# Altium PCB PCB.PcbDoc
Units mm, origin at the board's own origin, x right, y up, seen from the top; angles counter-clockwise.
Board outline 82.93 x 56.77 mm, 2 copper layers (Top Layer, Bottom Layer); 30 components, 26 nets, 99 pads, 0 vias.
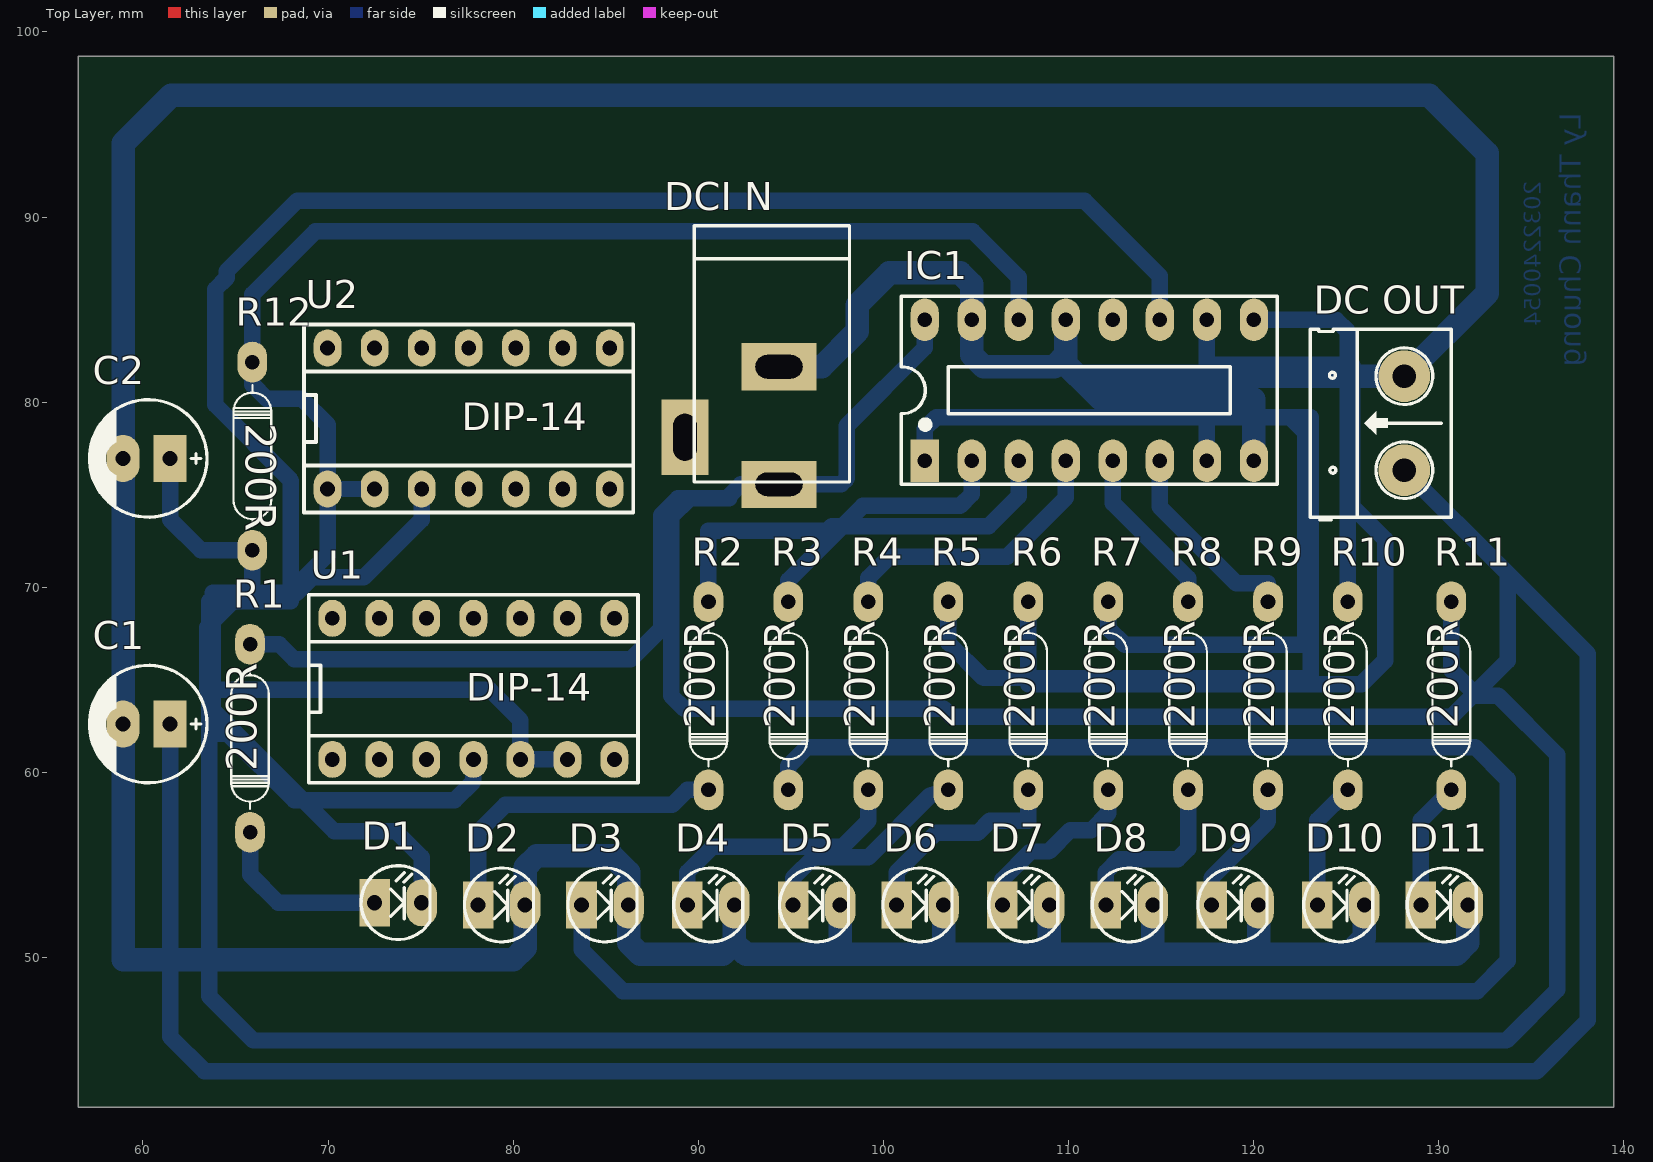
[diagram p0: Top Layer view]
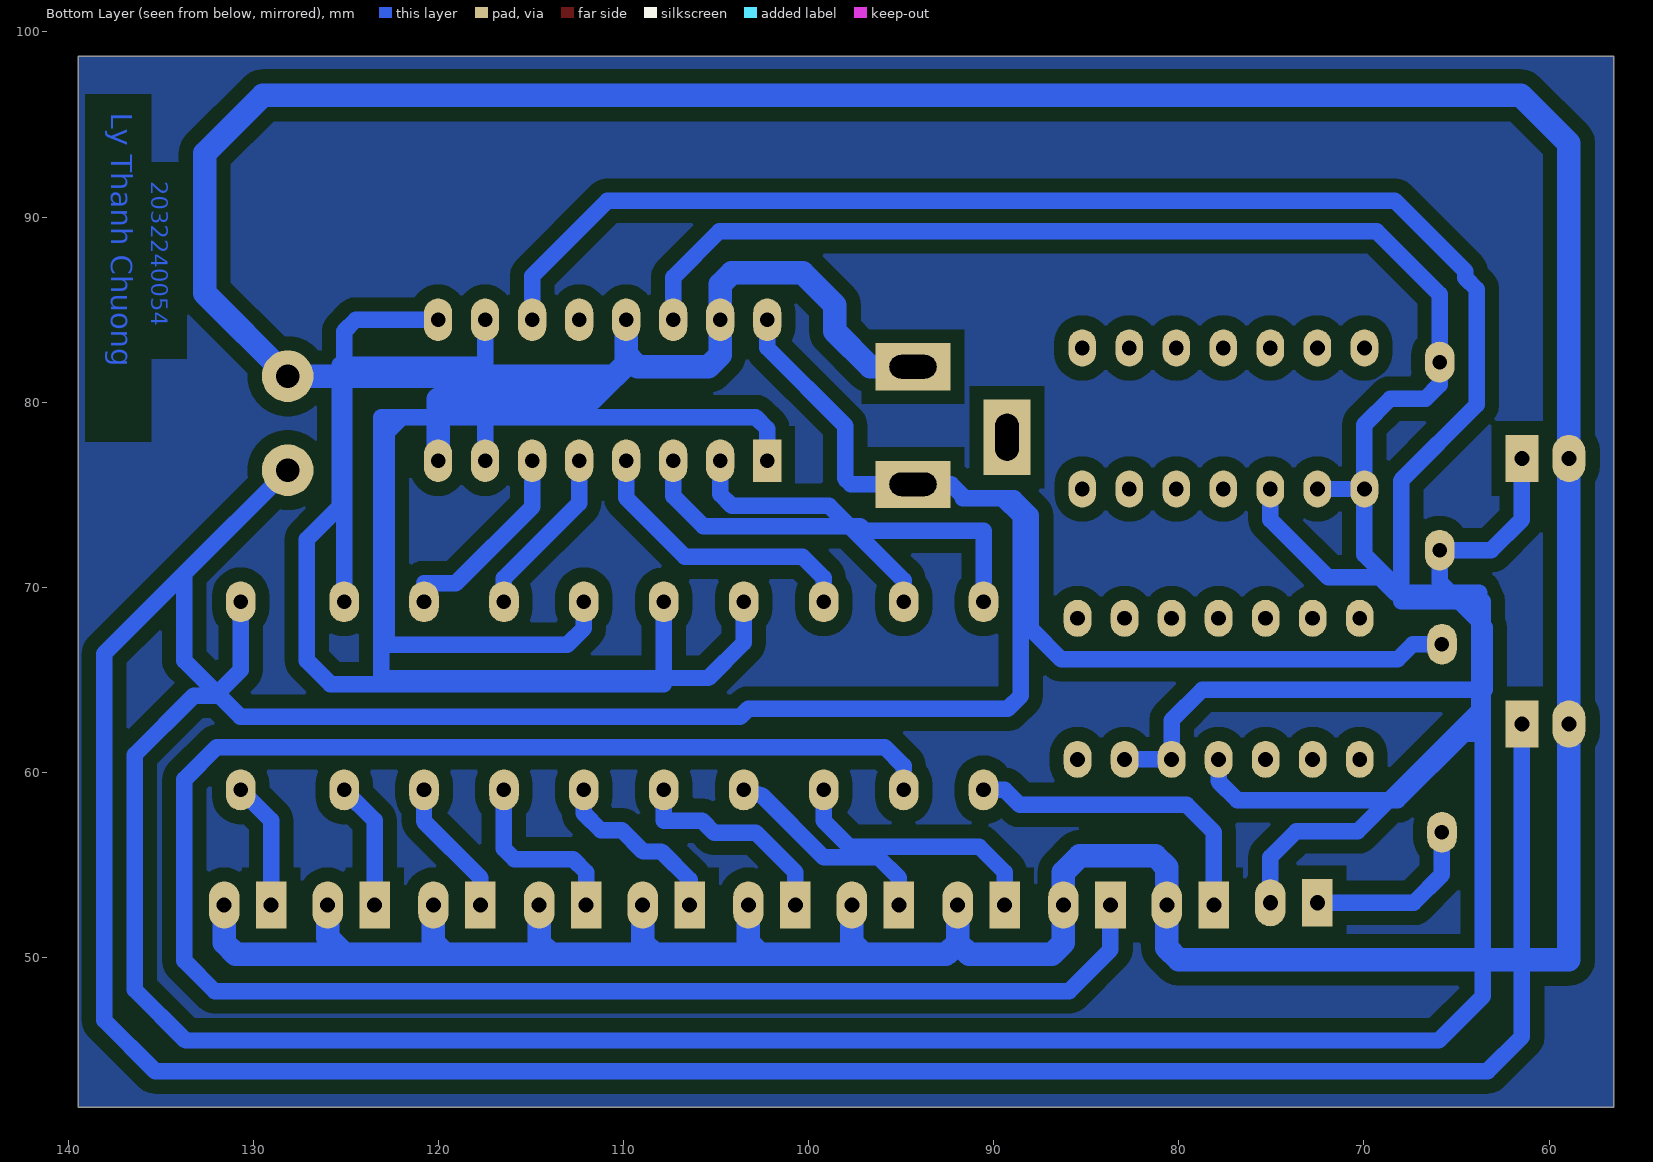
[diagram p1: Bottom Layer view, seen from below]
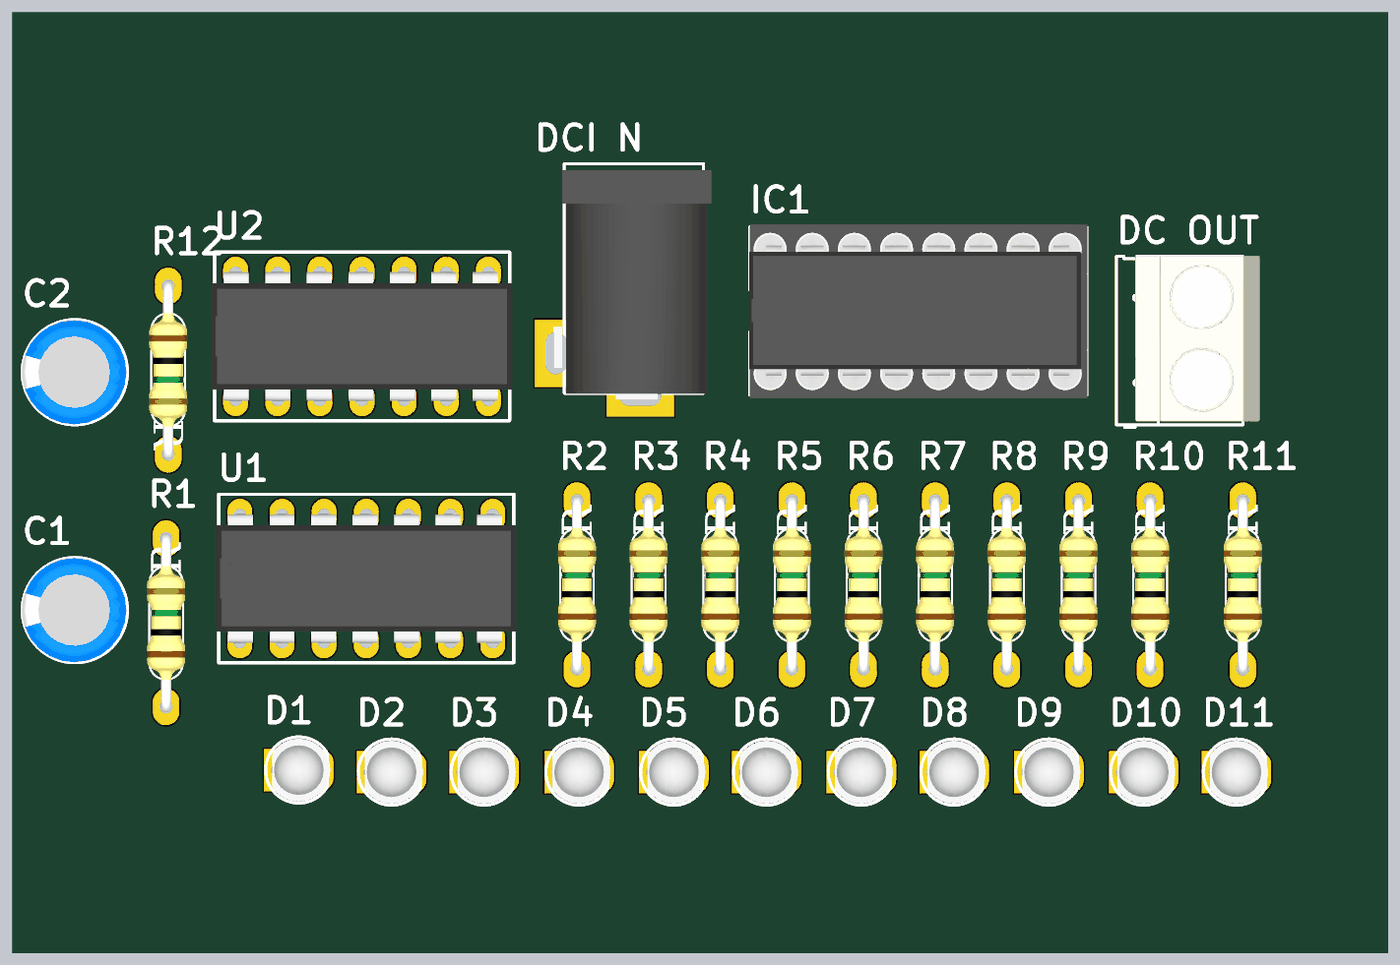
[diagram p2: 3D render of the assembled board from above, using the file's embedded part models]

## Layer stack, top to bottom
Top Solder: solder mask 0.0102, Solder Resist, Dk 3.5
Top Layer: signal copper 0.0356
Dielectric 1: dielectric 0.32, FR-4, Dk 4.8
Bottom Layer: signal copper 0.0356
Bottom Solder: solder mask 0.0102, Solder Resist, Dk 3.5

## Board outline
56.515,41.91 139.446,41.91 139.446,98.679 56.515,98.679

## Design rules (kind name [scope] priority, off if disabled: settings)
Clearance Clearance_1 [All] p1: gap=0.762 ignorepadtopadclearanceinfootprint=FALSE
Clearance [All] p2: gap=0.381 ignorepadtopadclearanceinfootprint=FALSE
PolygonConnect [All] p1: connectstyle=Relief reliefconductorwidth=0.254 reliefentries=4 polygonreliefangle="90 Angle" airgapwidth=0.254
RoutingLayers [All] p1: top layer_v5=FALSE bottom layer_v5=TRUE
RoutingVias [All] p1: holewidth=0.711 width=1.27 viastyle="Through Hole" minholewidth=0.711 minwidth=1.27 maxholewidth=0.711 maxwidth=1.27
SolderMaskExpansion [All] p1: expansion=0.102 istentingtop=FALSE
Width Width_1 [InNet('GND')] p1: maxlimit=1.27 minlimit=1.27 preferedwidth=1.27
Width [All] p2: maxlimit=1.016 minlimit=0.508 preferedwidth=0.889
29 further rules are at their usual default settings.

## Components (designator, comment, footprint, x,y, rotation, side; value= is the part's Value field where it differs from the comment)
C1 "47uF" CP1/2.5 61.468,62.611 r180 top value="47uF/16 - 50V"
C2 "1uF" CP1/2.5 61.468,76.962 r180 top value="47uF/16 - 50V"
D1 "LED" LED-3 72.517,52.959 r0 top value="LED 3 ly Single Colour"
D2 "LED" LED-3 78.105,52.832 r0 top value="LED 3 ly Single Colour"
D3 "LED" LED-3 83.693,52.832 r0 top value="LED 3 ly Single Colour"
D4 "LED" LED-3 89.408,52.832 r0 top value="LED 3 ly Single Colour"
D5 "LED" LED-3 95.123,52.832 r0 top value="LED 3 ly Single Colour"
D6 "LED" LED-3 100.711,52.832 r0 top value="LED 3 ly Single Colour"
D7 "LED" LED-3 106.426,52.832 r0 top value="LED 3 ly Single Colour"
D8 "LED" LED-3 112.014,52.832 r0 top value="LED 3 ly Single Colour"
D9 "LED" LED-3 117.729,52.832 r0 top value="LED 3 ly Single Colour"
D10 "LED" LED-3 123.444,52.832 r0 top value="LED 3 ly Single Colour"
D11 "LED" LED-3 129.032,52.832 r0 top value="LED 3 ly Single Colour"
"DC OUT" "Header 2" HED2 128.143,76.327 r90 top
"DCI N" "Jac DC" DC-IN 91.821,78.74 r270 top
IC1 "4017" DIP16/W0.3 102.235,76.835 r0 top value=CD4017
R1 "680" "DIEN TRO 1/4 W" 65.786,56.769 r90 top value=R
R2 "680" "DIEN TRO 1/4 W" 90.551,59.055 r90 top value=R
R3 "680" "DIEN TRO 1/4 W" 94.869,59.055 r90 top value=R
R4 "680" "DIEN TRO 1/4 W" 99.187,59.055 r90 top value=R
R5 "680" "DIEN TRO 1/4 W" 103.505,59.055 r90 top value=R
R6 "680" "DIEN TRO 1/4 W" 107.823,59.055 r90 top value=R
R7 "680" "DIEN TRO 1/4 W" 112.141,59.055 r90 top value=R
R8 "680" "DIEN TRO 1/4 W" 116.459,59.055 r90 top value=R
R9 "680" "DIEN TRO 1/4 W" 120.777,59.055 r90 top value=R
R10 "680" "DIEN TRO 1/4 W" 125.095,59.055 r90 top value=R
R11 "680" "DIEN TRO 1/4 W" 130.683,59.055 r90 top value=R
R12 "1M" "DIEN TRO 1/4 W" 65.913,82.169 r270 top value=R
U1 "4093" DIP14 77.851,64.516 r0 top
U2 "4093" DIP14 77.597,79.121 r0 top

## Footprints (in the part's own frame and the unit in brackets; to place one, negate y for a bottom-side part, rotate by r counter-clockwise, add the part's x,y. Pads: shape width x height; smd on the part's side, far side on the other; paste and mask are expansions set on the pad)
CP1/2.5 [mil] "Tu hoa 33 >100 uF,50V, 220uF/16V,25V"
  rect 70x100 hole 32: 1(0,0)
  oval 70x100 hole 32: 2(100,0)
  silkscreen extent -78,-125 172,125, body extent -76,-124 172,124, height 422
DC-IN [mil] "Jac DC input"
  rect 100x160 hole 50 slot 100 at 90 deg: 1(125,100) 2(-125,100)
  rect 160x100 hole 50 slot 100 at 0 deg: 3(25,-100)
  silkscreen extent -425,-80 120,250, body extent -410,-105 134,269, height 434
"DIEN TRO 1/4 W" [mm]
  oval 2.2x1.6 hole 0.787: 1(0,0) 2(10.16,0)
  silkscreen extent 1.26,-1.02 8.88,1.02, body extent -0.3,-1.16 10.46,1.16, height 2.93
DIP14 [mm] "W.300/L.900"
  oval 1.5x2 hole 0.8: 1(-7.62,-3.81) 2(-5.08,-3.81) 3(-2.54,-3.81) 4(0,-3.81) 5(2.54,-3.81) 6(5.08,-3.81) 7(7.62,-3.81) 8(7.62,3.81) 9(5.08,3.81) 10(2.54,3.81) 11(0,3.81) 12(-2.54,3.81) 13(-5.08,3.81) 14(-7.62,3.81)
  silkscreen extent -8.89,-5.08 8.89,5.08, body extent -9.05,-3.88 9.05,3.88, height 4.5
DIP16/W0.3 [mil] "16 PIN, W 300mil, Pin to pin 100mil"
  rect 60x90 hole 31: 1(0,0)
  oval 60x90 hole 31: 2(100,0) 3(200,0) 4(300,0) 5(400,0) 6(500,0) 7(600,0) 8(700,0) 9(700,300) 10(600,300) 11(500,300) 12(400,300) 13(300,300) 14(200,300) 15(100,300) 16(0,300)
  silkscreen extent -50,-50 750,350, body extent -52,-57 752,356, height 299
HED2 [mil] "Header 2, 2 pin, hight 300mil, Pin to Pin 200, Colour Green"
  round 110 hole 50: 1(0,0) 2(200,0)
  silkscreen extent -106,-100 300,200, body extent -92,-140 302,155, height 394
LED-3 [mil] "LED 2 PIN, 3ly Only colour"
  rect 65x100 hole 32: 1(0,0)
  oval 65x100 hole 32: 2(100,0)
  silkscreen extent -29,-78 118,79, body extent -13,-75 125,75, height 217

## Part data
C1 C2: library part CP2, "C 47uF/50V , 220uF/16V", Description 1="470uF/6,3V - 330uF/10V - 220uF/16V", Description 2="100uF/25V - 35V - 47uF/50V - 22uF/100V", Description 3="33uF => 47uF/63V - 1uF => 4,7uF/160V", Description 4="1uF => 2,2uF/250V - 1uF/350V"
D1 D2 D3 D4 D5 D6 D7 D8 D9 D10 D11: "LED Single colour Green and Red"
"DC OUT": library part Hed2, "Header 2 (Green)"
"DCI N": library part DCIN, "Jac DC input"
IC1: "Decade Counter/Divider with 10 Decoded Outputs", Designed by=VanDungEvn
R1 R2 R3 R4 R5 R6 R7 R8 R9 R10 R11 R12: library part "Res 1/4 W", "Resistor", LatestRevisionDate=17-Jul-2002, LatestRevisionNote="Re-released for DXP Platform.", PackageReference=AXIAL-0.4, Published=8-Jun-2000, Publisher="Altium Limited"
U1 U2: "Quad 2-INPUT NAND SCHMITT TRIGGER"

## Nets (pads, with @x,y where several pads share a name; then routed paths per layer and width w, separated by ;. In a path a pad name is that pad's centre, name@x,y a point inside that pad or via, vN(x,y) a via of type N, cw(c..) or ccw(c..) an arc to the next point about the centre after c; other vN are vias at no path point)
GND: "DC OUT.2" "DCI N.2" C1.2 C2.2 D2.2 D3.2 D4.2 D5.2 D6.2 D7.2 D8.2 D9.2 D10.2 D11.2 IC1.8 IC1.13 IC1.15 | length 297.4
  Bottom Layer w1.27: D4.2 91.948,50.8 ; 94.361,81.915 96.672,81.915 98.577,83.82 98.577,85.242 100.33,86.995 104.14,86.995 104.775,86.36 IC1.15 104.775,82.55 105.41,81.915 109.22,81.915 109.614,82.309 ; D5.2 97.663,50.8 97.028,50.165 ; D6.2 103.251,50.8 102.616,50.165 ; D7.2 108.966,50.8 108.331,50.165 ; IC1.13 109.855,82.55 ; D8.2 114.554,50.8 113.919,50.165 ; IC1.8 120.015,80.162 111.76,80.162 110.515,81.407 ; D9.2 120.269,50.8 119.634,50.165 ; D10.2 125.984,51.079 125.07,50.165 ; D11.2 131.572,50.8 130.937,50.165 125.07,50.165 ; 91.948,50.8 91.313,50.165 86.868,50.165 86.233,50.8 D3.2 86.233,54.61 85.344,55.499 81.28,55.499 80.645,54.864 D2.2 80.645,50.521 80.01,49.886 58.928,49.886 C1.2 C2.2 58.928,93.98 61.519,96.571 129.489,96.571 132.613,93.447 132.613,85.877 128.143,81.407 110.515,81.407 ; 91.948,50.8 92.583,50.165 97.028,50.165 ; 97.028,50.165 102.616,50.165 ; 102.616,50.165 108.331,50.165 ; 108.331,50.165 113.919,50.165 ; 109.614,82.309 109.855,82.55 ; 109.614,82.309 109.855,82.067 ; 109.614,82.309 109.855,82.309 ; 109.855,82.067 109.855,82.309 ; 109.855,82.067 109.855,82.042 110.49,81.407 110.515,81.407 ; 109.855,82.067 110.515,81.407 ; 109.855,82.309 109.855,82.55 ; 113.919,50.165 119.634,50.165 ; 119.634,50.165 125.07,50.165
NetC2_1: C2.1 R12.2 U1.5 U1.6 | length 39.2
  Bottom Layer w0.889: C2.1 61.468,73.66 63.119,72.009 R12.2 65.913,70.282 63.475,67.843 63.475,64.465 78.74,64.465 80.391,62.814 U1.5 U1.6
NetD1_1: D1.1 R1.1 | length 9.6
  Bottom Layer w0.889: R1.1 65.786,54.483 67.31,52.959 D1.1
NetD1_2: D1.2 U2.3 | length 37.5
  Bottom Layer w0.889: D1.2 75.057,55.423 73.66,56.82 70.333,56.82 63.576,63.576 63.576,68.428 64.821,69.672 68.275,69.672 69.139,70.536 71.933,70.536 75.057,73.66 U2.3
NetD2_1: D2.1 R2.1 | length 17.3
  Bottom Layer w0.889: D2.1 78.105,56.769 79.578,58.242 88.595,58.242 89.408,59.055 R2.1
NetD3_1: D3.1 R3.1 | length 105.1
  Bottom Layer w0.889: D3.1 83.693,50.419 85.928,48.184 132.08,48.184 133.722,49.825 133.722,59.623 131.978,61.366 95.885,61.366 94.869,60.35 R3.1
NetD4_1: D4.1 R4.1 | length 14.4
  Bottom Layer w0.889: D4.1 89.408,54.61 90.78,55.982 97.79,55.982 99.187,57.379 R4.1
NetD5_1: D5.1 R5.1 | length 11.7
  Bottom Layer w0.889: D5.1 95.123,54.305 96.241,55.423 99.189,55.423 102.516,58.75 R5.1
NetD6_1: D6.1 R6.1 | length 11.7
  Bottom Layer w0.889: D6.1 100.711,54.61 102.845,56.744 105.105,56.744 105.74,57.379 107.823,57.379 R6.1
NetD7_1: D7.1 R7.1 | length 9.8
  Bottom Layer w0.889: D7.1 106.426,54.204 107.95,55.728 108.941,55.728 110.084,56.871 111.227,56.871 112.141,57.785 R7.1
NetD8_1: D8.1 R8.1 | length 9.9
  Bottom Layer w0.889: D8.1 112.014,54.61 112.725,55.321 115.9,55.321 116.459,55.88 R8.1
NetD9_1: D9.1 R9.1 | length 7.5
  Bottom Layer w0.889: D9.1 117.729,54.305 120.777,57.353 R9.1
NetD10_1: D10.1 R10.1 | length 6.9
  Bottom Layer w0.889: D10.1 123.444,57.404 R10.1
NetD11_1: D11.1 R11.1 | length 6.9
  Bottom Layer w0.889: D11.1 129.032,57.404 R11.1
NetIC1_1: IC1.1 R7.2 | length 46.8
  Bottom Layer w0.889: IC1.1 102.235,78.562 102.87,79.197 121.971,79.197 122.784,78.384 122.784,66.904 113.03,66.904 112.141,67.793 R7.2
NetIC1_2: IC1.2 R3.2 | length 14.8
  Bottom Layer w0.889: R3.2 94.869,70.383 98.882,74.397 104.14,74.397 104.775,75.032 IC1.2
NetIC1_3: IC1.3 R2.2 | length 23.3
  Bottom Layer w0.889: R2.2 90.551,73.05 96.952,73.05 97.206,73.304 105.689,73.304 107.315,74.93 IC1.3
NetIC1_4: IC1.4 R4.2 | length 15.8
  Bottom Layer w0.889: R4.2 99.187,70.51 100.33,71.653 106.68,71.653 109.855,74.828 IC1.4
NetIC1_5: IC1.5 R8.2 | length 9.3
  Bottom Layer w0.889: IC1.5 112.395,74.549 116.459,70.485 R8.2
NetIC1_6: IC1.6 R9.2 | length 11.1
  Bottom Layer w0.889: IC1.6 114.935,74.346 119.052,70.229 120.777,70.229 R9.2
NetIC1_7: IC1.7 R5.2 | length 44.7
  Bottom Layer w0.889: R5.2 103.505,67.005 105.41,65.1 123.088,65.1 123.088,79.197 117.475,79.197 IC1.7
NetIC1_9: IC1.9 R10.2 | length 19.9
  Bottom Layer w0.889: IC1.9 124.46,84.455 125.095,83.82 R10.2
NetIC1_10: IC1.10 R6.2 | length 51.2
  Bottom Layer w0.889: R6.2 107.823,64.77 125.832,64.77 127.102,66.04 127.102,72.593 125.324,74.371 125.324,82.017 117.475,82.017 IC1.10
NetIC1_11: IC1.11 R11.2 | length 200.5
  Bottom Layer w0.889: IC1.11 114.935,86.817 110.871,90.881 68.326,90.881 64.516,87.071 64.516,86.716 63.906,86.106 63.906,79.858 67.996,75.768 67.996,69.24 63.576,69.24 63.576,47.904 65.964,45.517 133.655,45.517 136.398,48.26 136.398,60.96 133.223,64.135 132.08,64.135 130.683,65.532 R11.2
NetIC1_14: IC1.14 R12.1 U1.4 U2.1 U2.2 | length 97.4
  Bottom Layer w0.889: U2.2 U2.1 ; U1.4 77.851,59.512 76.835,58.496 68.174,58.496 64.592,62.078 63.779,62.078 63.779,69.698 67.92,69.698 69.977,71.755 U2.1 ; IC1.14 107.315,86.741 104.826,89.23 69.317,89.23 65.913,85.827 R12.1 65.913,80.95 66.675,80.188 68.58,80.188 69.977,78.791 U2.1
VCC: "DC OUT.1" "DCI N.1" C1.1 IC1.16 R1.2 | length 242.7
  Bottom Layer w0.889: C1.1 61.468,45.72 63.322,43.866 135.306,43.866 138.049,46.609 138.049,66.421 133.731,70.739 ; R1.2 67.361,66.929 68.174,66.116 86.36,66.116 87.986,67.742 87.986,73.889 88.9,74.803 89.535,74.803 ; IC1.16 102.235,82.944 98.031,78.74 98.031,75.882 97.714,75.565 94.361,75.565 92.304,75.565 91.669,74.93 ; 128.143,76.327 133.731,70.739 ; 89.535,74.803 91.542,74.803 ; 89.535,74.803 88.544,73.812 88.544,64.135 89.23,63.449 103.251,63.449 103.683,63.017 130.708,63.017 133.731,66.04 133.731,70.739 ; 91.542,74.803 91.669,74.93 ; 91.542,74.803 91.669,74.803 91.669,74.93
pads on no net: "DCI N.3" IC1.12 U1.1 U1.2 U1.3 U1.7 U1.8 U1.9 U1.10 U1.11 U1.12 U1.13 U1.14 U2.4 U2.5 U2.6 U2.7 U2.8 U2.9 U2.10 U2.11 U2.12 U2.13 U2.14

## Polygon pours and split planes (outlines as drawn)
no net on Bottom Layer "NONET_L02_P000" (solid, pour order 0): 56.515,98.679 139.446,98.679 139.446,41.91 56.515,41.91

## Other copper
Bottom Layer:
  text "Ly Thanh Chuong" at 137.668,95.631 h1.14 r90
  text "2032240054" at 135.509,91.948 h0.89 r90

## Text inside footprints (layer, text, board x,y; h text height)
R1: Top Overlay "200R" at 66.675,60.071 h2.8 r90
R2: Top Overlay "200R" at 91.44,62.357 h2.8 r90
R3: Top Overlay "200R" at 95.758,62.357 h2.8 r90
R4: Top Overlay "200R" at 100.076,62.357 h2.8 r90
R5: Top Overlay "200R" at 104.394,62.357 h2.8 r90
R6: Top Overlay "200R" at 108.712,62.357 h2.8 r90
R7: Top Overlay "200R" at 113.03,62.357 h2.8 r90
R8: Top Overlay "200R" at 117.348,62.357 h2.8 r90
R9: Top Overlay "200R" at 121.666,62.357 h2.8 r90
R10: Top Overlay "200R" at 125.984,62.357 h2.8 r90
R11: Top Overlay "200R" at 131.572,62.357 h2.8 r90
R12: Top Overlay "200R" at 65.024,78.867 h2.8 r270
U1: Top Overlay "DIP-14" at 77.47,63.881 h1.5
U2: Top Overlay "DIP-14" at 77.216,78.486 h1.5